# Altium PCB OnlyRes.PcbDoc
Units mil, origin at the board's own origin, x right, y up, seen from the top; angles counter-clockwise.
Board outline 6000 x 4000 mil, 2 copper layers (Top Layer, Bottom Layer); 17 components, 10 nets, 42 pads, 2 vias.
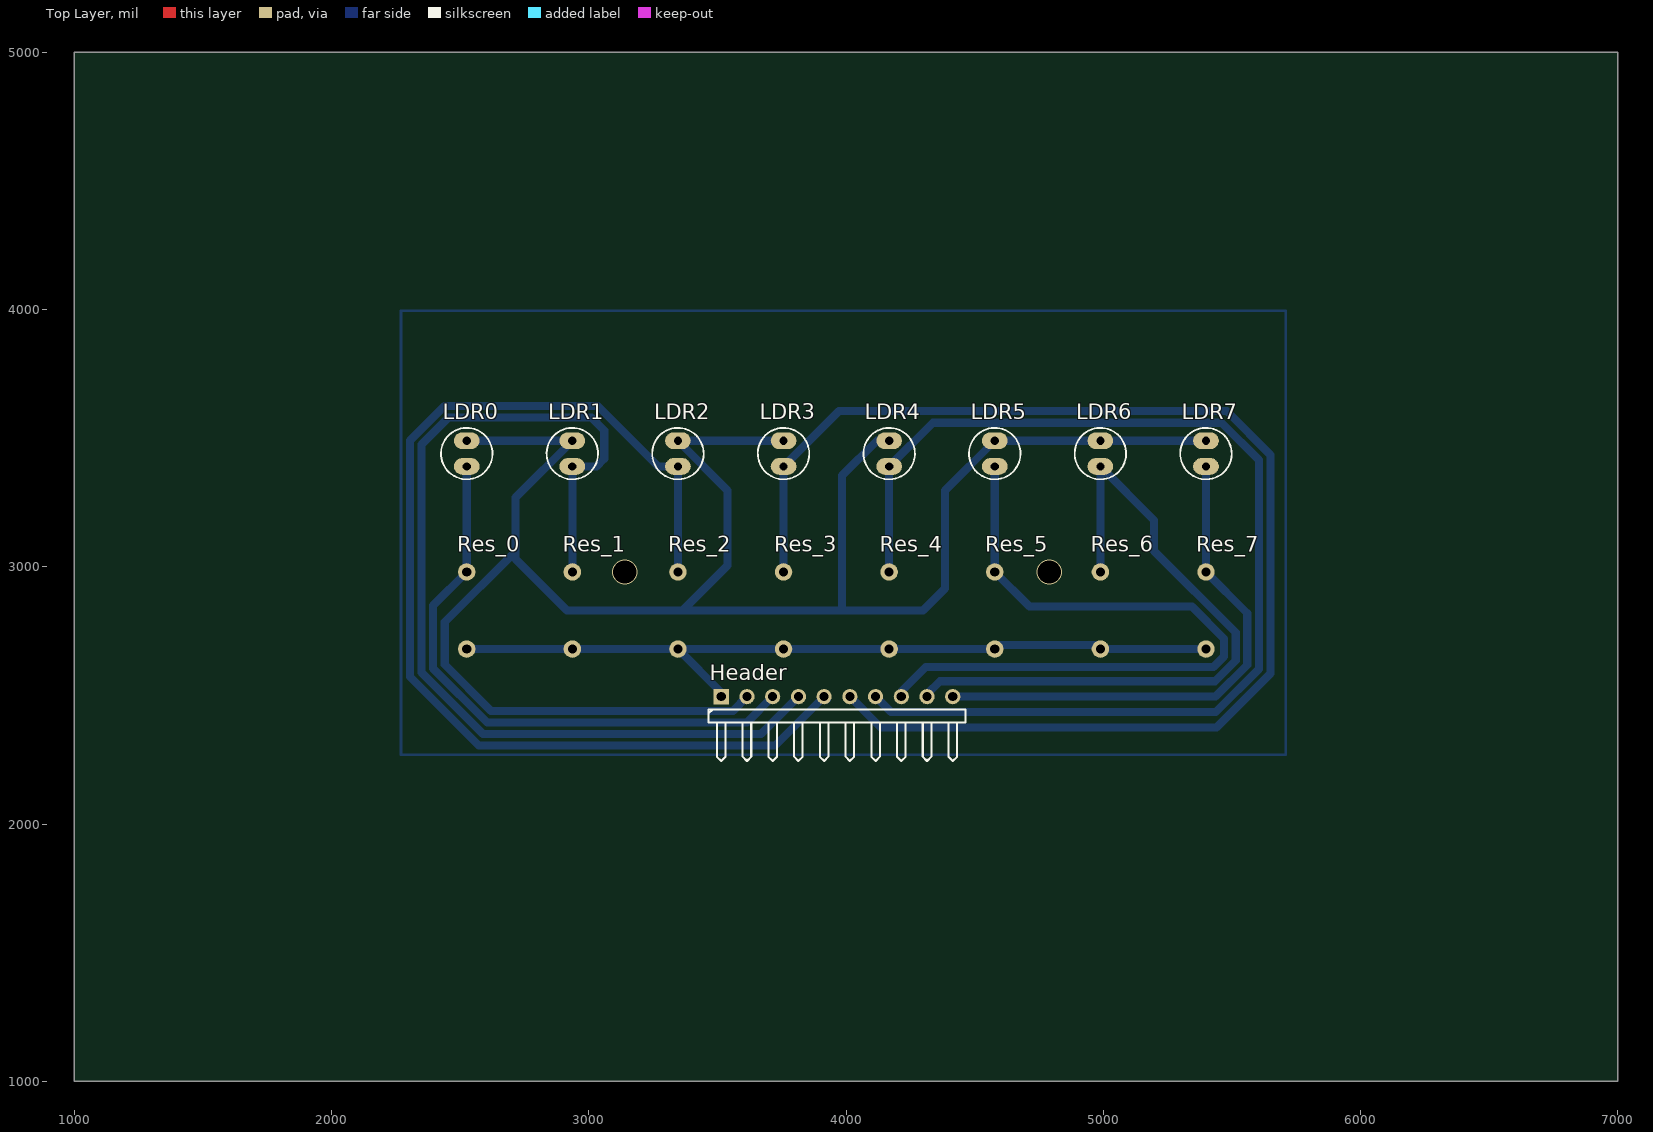
[diagram p0: Top Layer view]
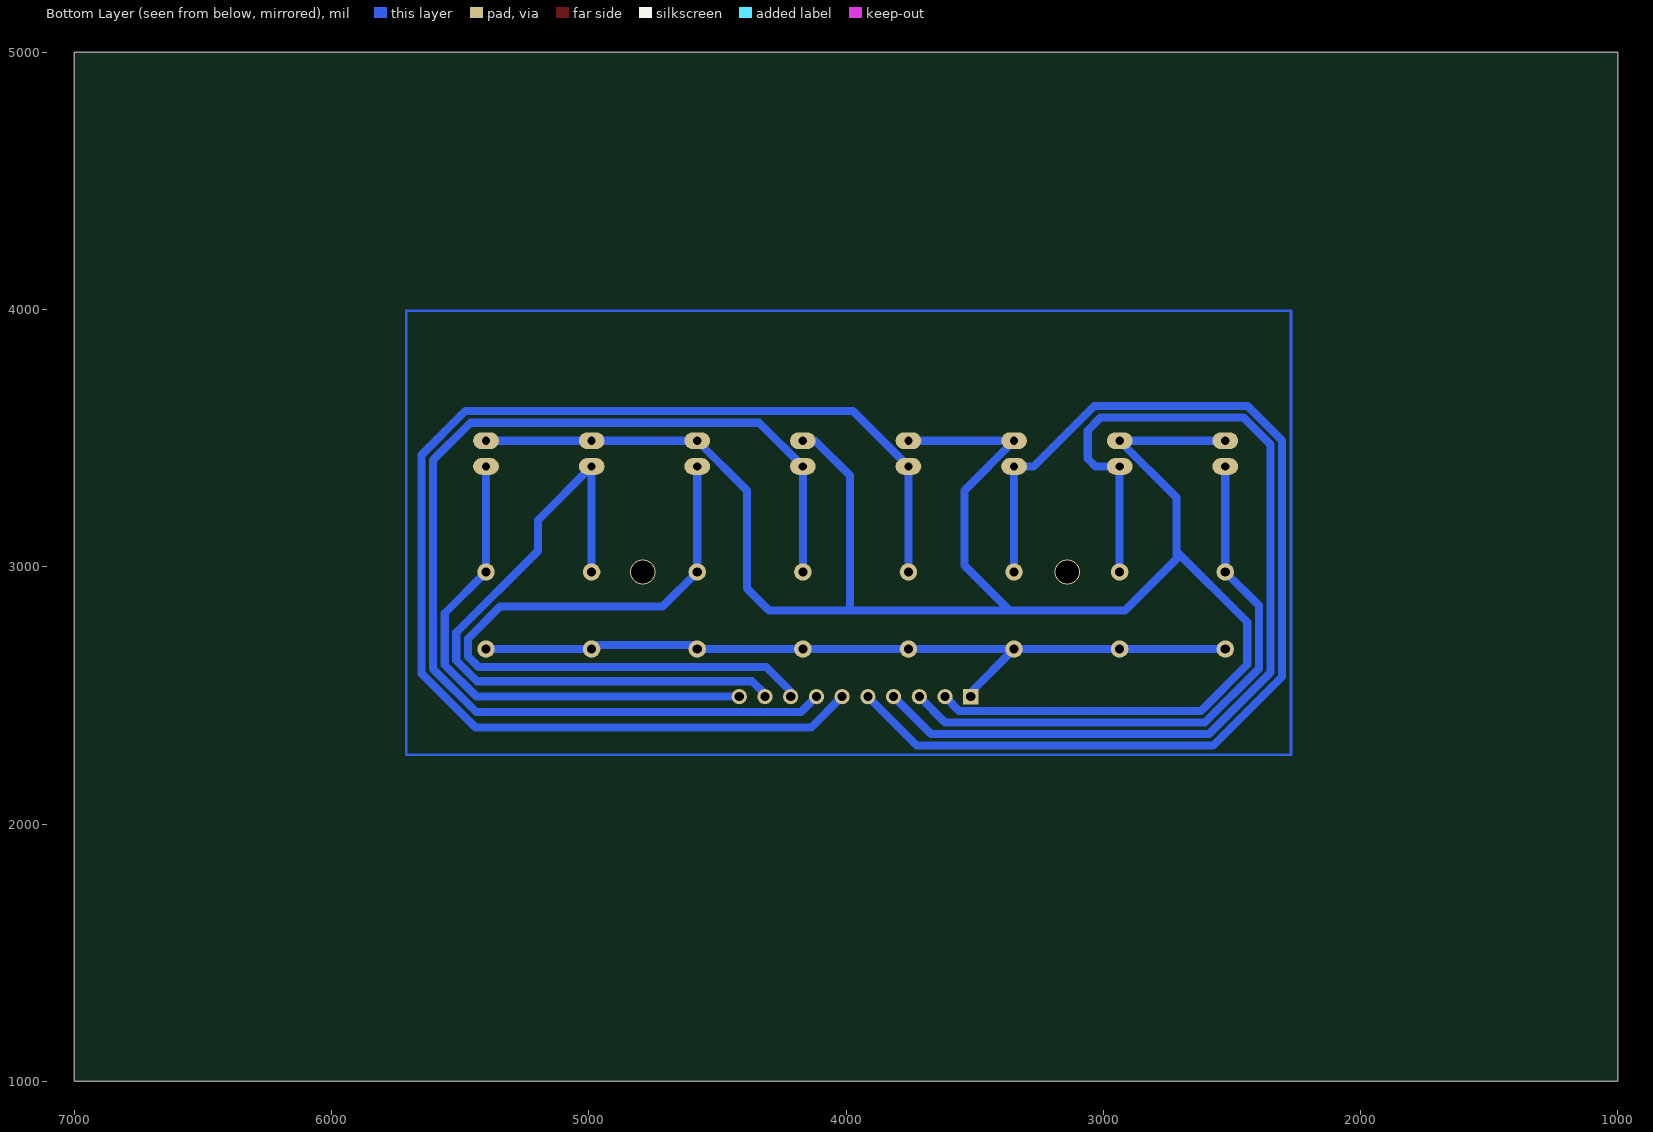
[diagram p1: Bottom Layer view, seen from below]
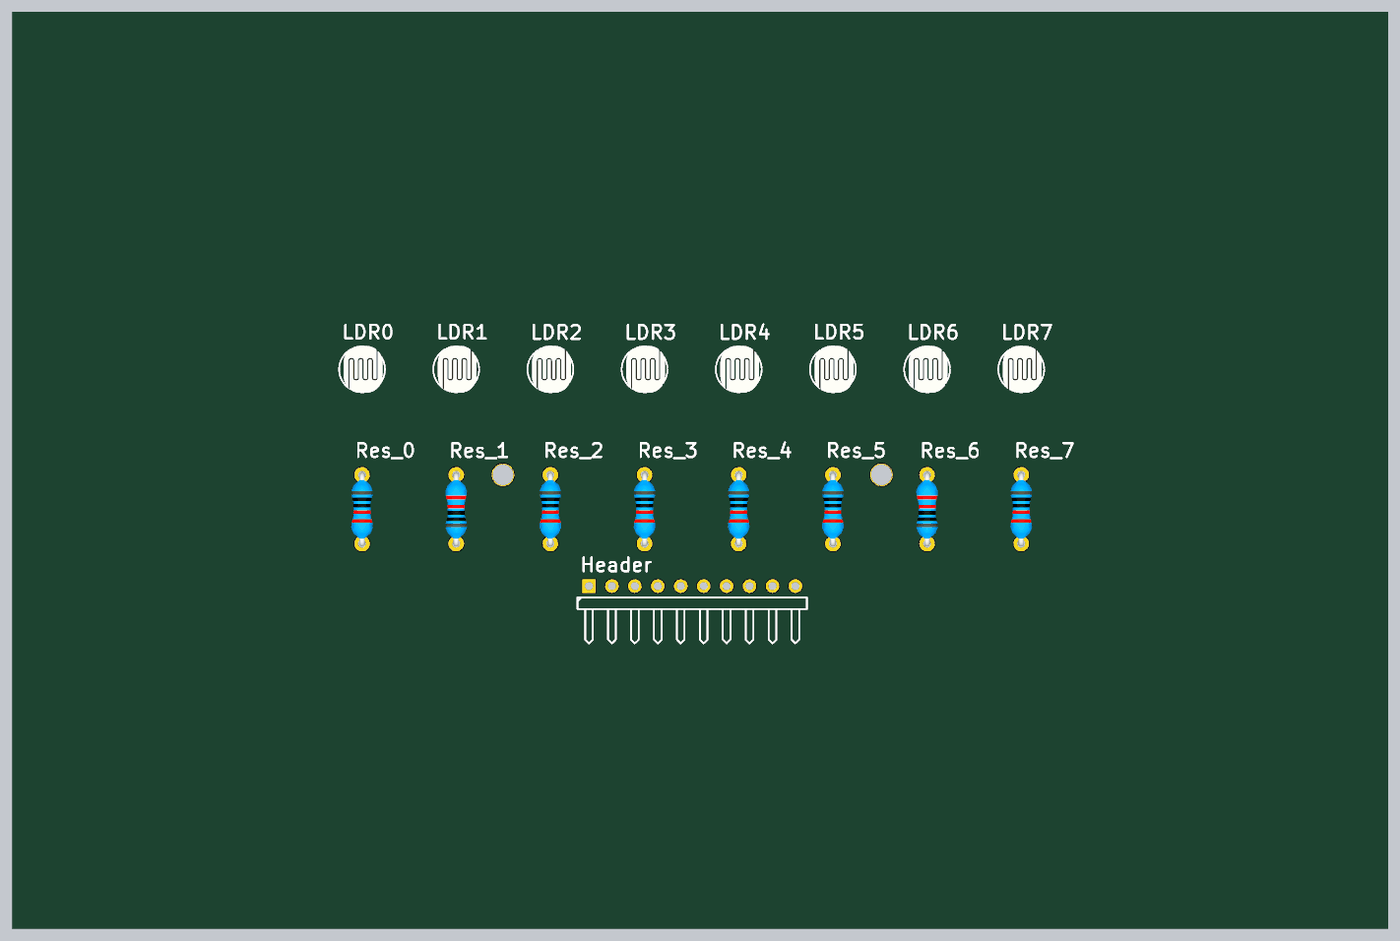
[diagram p2: 3D render of the assembled board from above, using the file's embedded part models]

## Layer stack, top to bottom
Top Solder: solder mask 0.4, Solder Resist, Dk 3.5
Top Layer: signal copper 1.4
Dielectric 1: dielectric 12.6, FR-4, Dk 4.8
Bottom Layer: signal copper 1.4
Bottom Solder: solder mask 0.4, Solder Resist, Dk 3.5

## Board outline
1000,1000 7000,1000 7000,5000 1000,5000

## Design rules (kind name [scope] priority, off if disabled: settings)
Clearance [All] p1: gap=0.3 ignorepadtopadclearanceinfootprint=FALSE
PolygonConnect [All] p1: connectstyle=Relief reliefconductorwidth=10 reliefentries=4 polygonreliefangle="90 Angle" airgapwidth=10
RoutingLayers [All] p1: top layer_v5=FALSE bottom layer_v5=TRUE
RoutingVias [All] p1: holewidth=28 width=50 viastyle="Through Hole" minholewidth=28 minwidth=50 maxholewidth=28 maxwidth=50
SolderMaskExpansion [All] p1: expansion=4
Width [All] p1: maxlimit=31.5 minlimit=31.5 preferedwidth=31.5
29 further rules are at their usual default settings.

## Classes and differential pairs
component class OnlyRes: Header LDR0 LDR1 LDR2 LDR3 LDR4 LDR5 LDR6 LDR7 Res_0 Res_1 Res_2 Res_3 Res_4 Res_6 Res_7

## Components (designator, comment, footprint, x,y, rotation, side; value= is the part's Value field where it differs from the comment)
Header "Header 10H" HDR1X10H 3515,2495 r0 top
LDR0 "LDR" CDS 2525.56,3490 r270 top
LDR1 "LDR" CDS 2936.11,3490 r270 top
LDR2 "LDR" CDS 3346.67,3490 r270 top
LDR3 "LDR" CDS 3757.22,3490 r270 top
LDR4 "LDR" CDS 4167.78,3490 r270 top
LDR5 "LDR" CDS 4578.33,3490 r270 top
LDR6 "LDR" CDS 4988.89,3490 r270 top
LDR7 "LDR" CDS 5399.44,3490 r270 top
Res_0 "Res" Resistor_300mil 2525.56,2980 r270 top
Res_1 "Res" Resistor_300mil 2936.11,2680 r90 top
Res_2 "Res" Resistor_300mil 3346.67,2980 r270 top
Res_3 "Res" Resistor_300mil 3757.22,2980 r270 top
Res_4 "Res" Resistor_300mil 4167.78,2980 r270 top
Res_5 "Res" Resistor_300mil 4578.33,2980 r270 top
Res_6 "Res" Resistor_300mil 4988.89,2680 r90 top
Res_7 "Res" Resistor_300mil 5399.44,2980 r270 top

## Footprints (in the part's own frame and the unit in brackets; to place one, negate y for a bottom-side part, rotate by r counter-clockwise, add the part's x,y. Pads: shape width x height; smd on the part's side, far side on the other; paste and mask are expansions set on the pad)
CDS [mil] "QUANG TRO"
  oval 65x100 hole 32: 1(0,0) 2(100,0)
  silkscreen extent -50,-100 150,100, body extent -53,-80 153,89, height 138
HDR1X10H [mm] "Connector; Header; 10 Position; Right Angle"
  rect 1.5x1.5 hole 0.9: 1(0,0)
  round 1.5 hole 0.9: 2(2.54,0) 3(5.08,0) 4(7.62,0) 5(10.16,0) 6(12.7,0) 7(15.24,0) 8(17.78,0) 9(20.32,0) 10(22.86,0)
  silkscreen extent -1.27,-6.35 24.13,-1.27
Resistor_300mil [mm]
  round 1.724 hole 0.9: 1(0,0) 2(7.62,0)
  body extent -0.3,-1.2 7.92,1.2, height 2.73

## Part data
Header: "Header, 10-Pin, Right Angle", LatestRevisionDate=17-Jul-2002, LatestRevisionNote="Re-released for DXP Platform.", Publisher="Altium Limited"
LDR0 LDR1 LDR2 LDR3 LDR4 LDR5 LDR6 LDR7: "Quang Tro"

## Via types
v1: diameter 98.43, hole 90.55, Top Layer to Bottom Layer, 2 vias

## Nets (pads, with @x,y where several pads share a name; then routed paths per layer and width w, separated by ;. In a path a pad name is that pad's centre, name@x,y a point inside that pad or via, vN(x,y) a via of type N, cw(c..) or ccw(c..) an arc to the next point about the centre after c; other vN are vias at no path point)
GND: Header.2 LDR0.1 LDR1.1 LDR2.1 LDR3.1 LDR4.1 LDR5.1 LDR6.1 LDR7.1 | length 7986.1
  Bottom Layer w31.5: LDR0.1 LDR1.1 2715,3268.89 2715,3060 ; LDR2.1 3540,3296.67 3540,3005 3365,2830 ; 3400,3490 LDR3.1 ; Header.2 3560,2440 2620,2440 2440,2620 2440,2785 2715,3060 ; LDR4.1 4120,3490 3985,3355 3985,2830 ; LDR7.1 LDR6.1 LDR5.1 4385,3296.67 4385,2915 4300,2830 3985,2830 ; 2715,3060 2715,3030 2915,2830 3365,2830 ; 3365,2830 3985,2830
S1: Header.3 LDR0.2 Res_0.1 | length 2288.4
  Bottom Layer w31.5: LDR0.2@2525.56,3390.56 LDR0.2 Res_0.1 2395,2849.44 2395,2605 2605.39,2394.61 3614.61,2394.61 Header.3
S2: Header.4 LDR1.2 Res_1.2 | length 3940.7
  Bottom Layer w31.5: Res_1.2 LDR1.2 3030,3390 3060,3420 3060,3530 3010,3580 2455,3580 2350,3475 2350,2588.75 2588.75,2350 3670,2350 Header.4
S3: Header.5 LDR2.2 Res_2.1 | length 4328.5
  Bottom Layer w31.5: Res_2.1 LDR2.2 3270,3390 3035,3625 2438.75,3625 2305,3491.25 2305,2572.51 2572.51,2305 3725,2305 3905,2485 Header.5@3925,2485
S4: Header.6 LDR3.2 Res_3.1 | length 5083.9
  Bottom Layer w31.5: Res_3.1 LDR3.2 3972.22,3605 5480,3605 5650,3435 5650,2585 5440,2375 4135,2375 Header.6
S5: Header.7 LDR4.2 Res_4.1 | length 4374.5
  Bottom Layer w31.5: Header.7 4175,2435 5437.55,2435 5605,2602.45 5605,3415 5460,3560 4337.78,3560 LDR4.2 Res_4.1
S6: Header.8 LDR5.2 Res_5.1 | length 2809.6
  Bottom Layer w31.5: Header.8 4215,2515 4310,2610 5428.81,2610 5470,2651.19 5470,2720 5345,2845 4713.33,2845 Res_5.1 LDR5.2
S7: Header.9 LDR6.2 Res_6.2 | length 2646.8
  Bottom Layer w31.5: Header.9 4315,2505 4365,2555 5435.06,2555 5515,2634.94 5515,2745 5198,3062 5198,3180.89 LDR6.2 Res_6.2
S8: Header.10 LDR7.2 Res_7.1 | length 2034
  Bottom Layer w31.5: Header.10 5436.3,2495 5560,2618.7 5560,2819.44 Res_7.1 LDR7.2
VCC: Header.1 Res_0.2 Res_1.1 Res_2.2 Res_3.2 Res_4.2 Res_5.2 Res_6.1 Res_7.2 | length 3142.3
  Bottom Layer w31.5: Res_0.2 Res_1.1 Res_2.2 ; Header.1 3515,2511.67 Res_2.2 ; Res_7.2 Res_6.1 4972.39,2696.5 4594.83,2696.5 Res_5.2 Res_4.2 Res_3.2 Res_2.2
copper on no net: | length 10330
  Bottom Layer w10: 2270,2270 2270,3995 5710,3995 5710,2270 2270,2270
  other v1: 3140,2980 4790,2980